# Altium PCB CC112xEM.PcbDoc
Units mil, origin at the board's own origin, x right, y up, seen from the top; angles counter-clockwise.
Board outline 1550.5 x 1401.5 mil, 4 copper layers (1, 2, 3, 4); 54 components, 34 nets, 148 pads, 31 vias.
Unrouted connection lines stored in the file: 53.
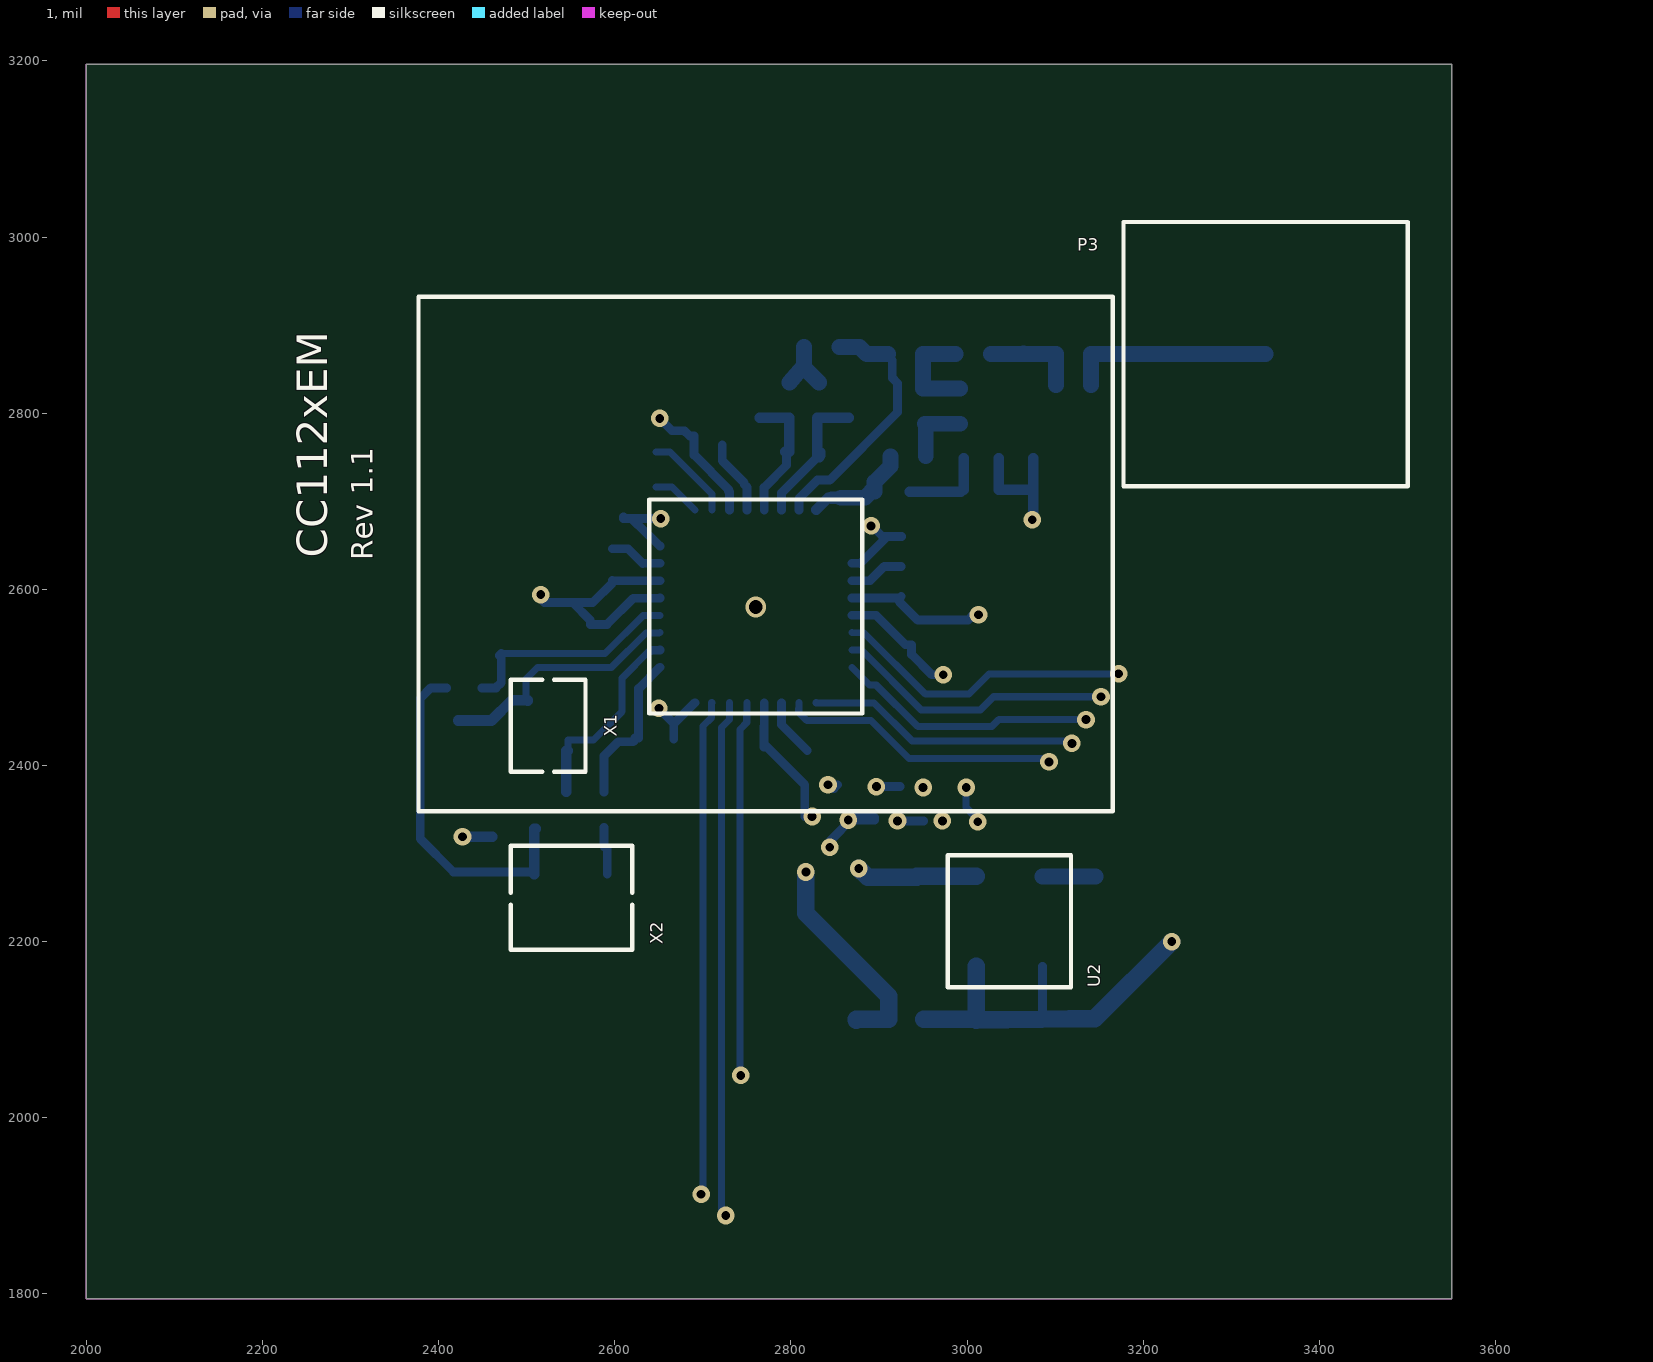
[diagram p0: 1 view]
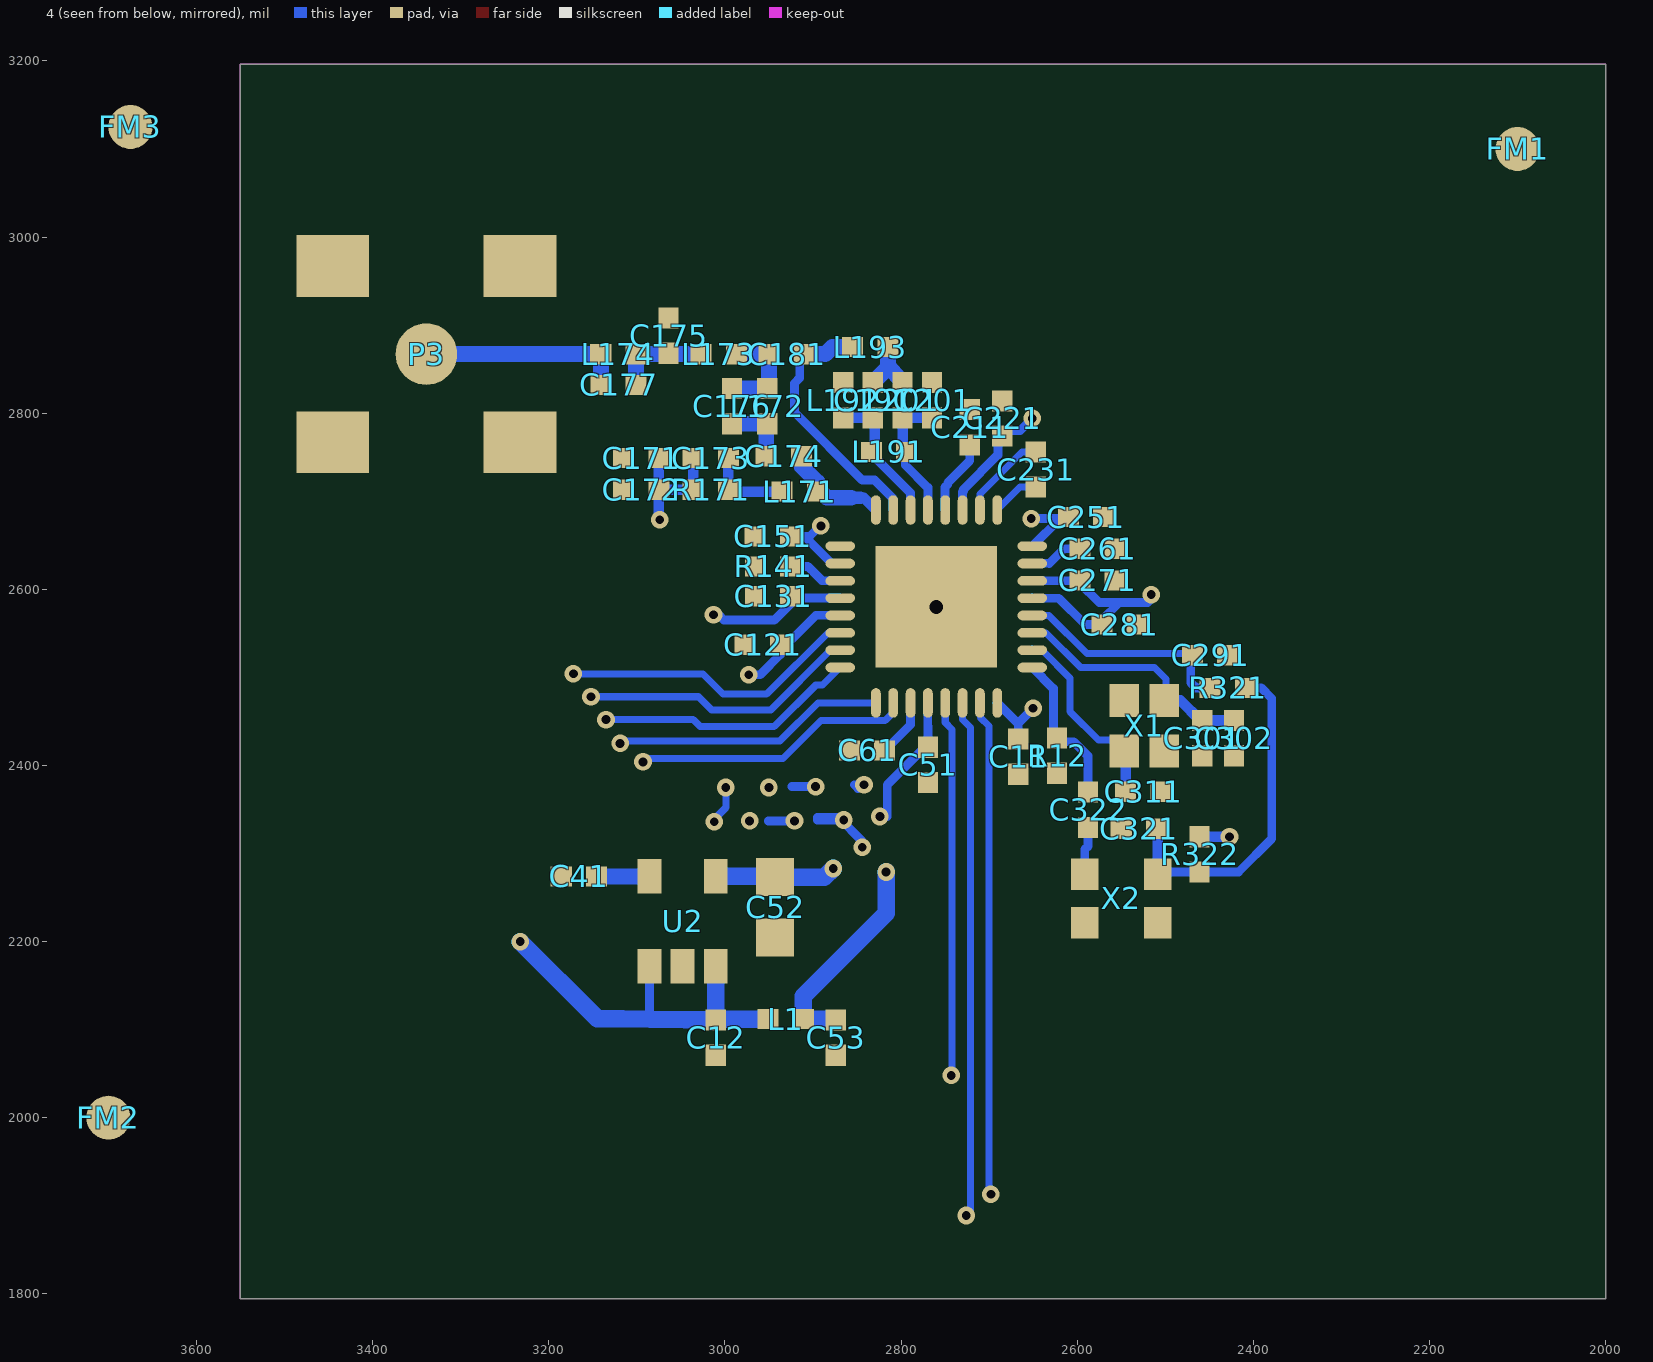
[diagram p1: 4 view, seen from below]
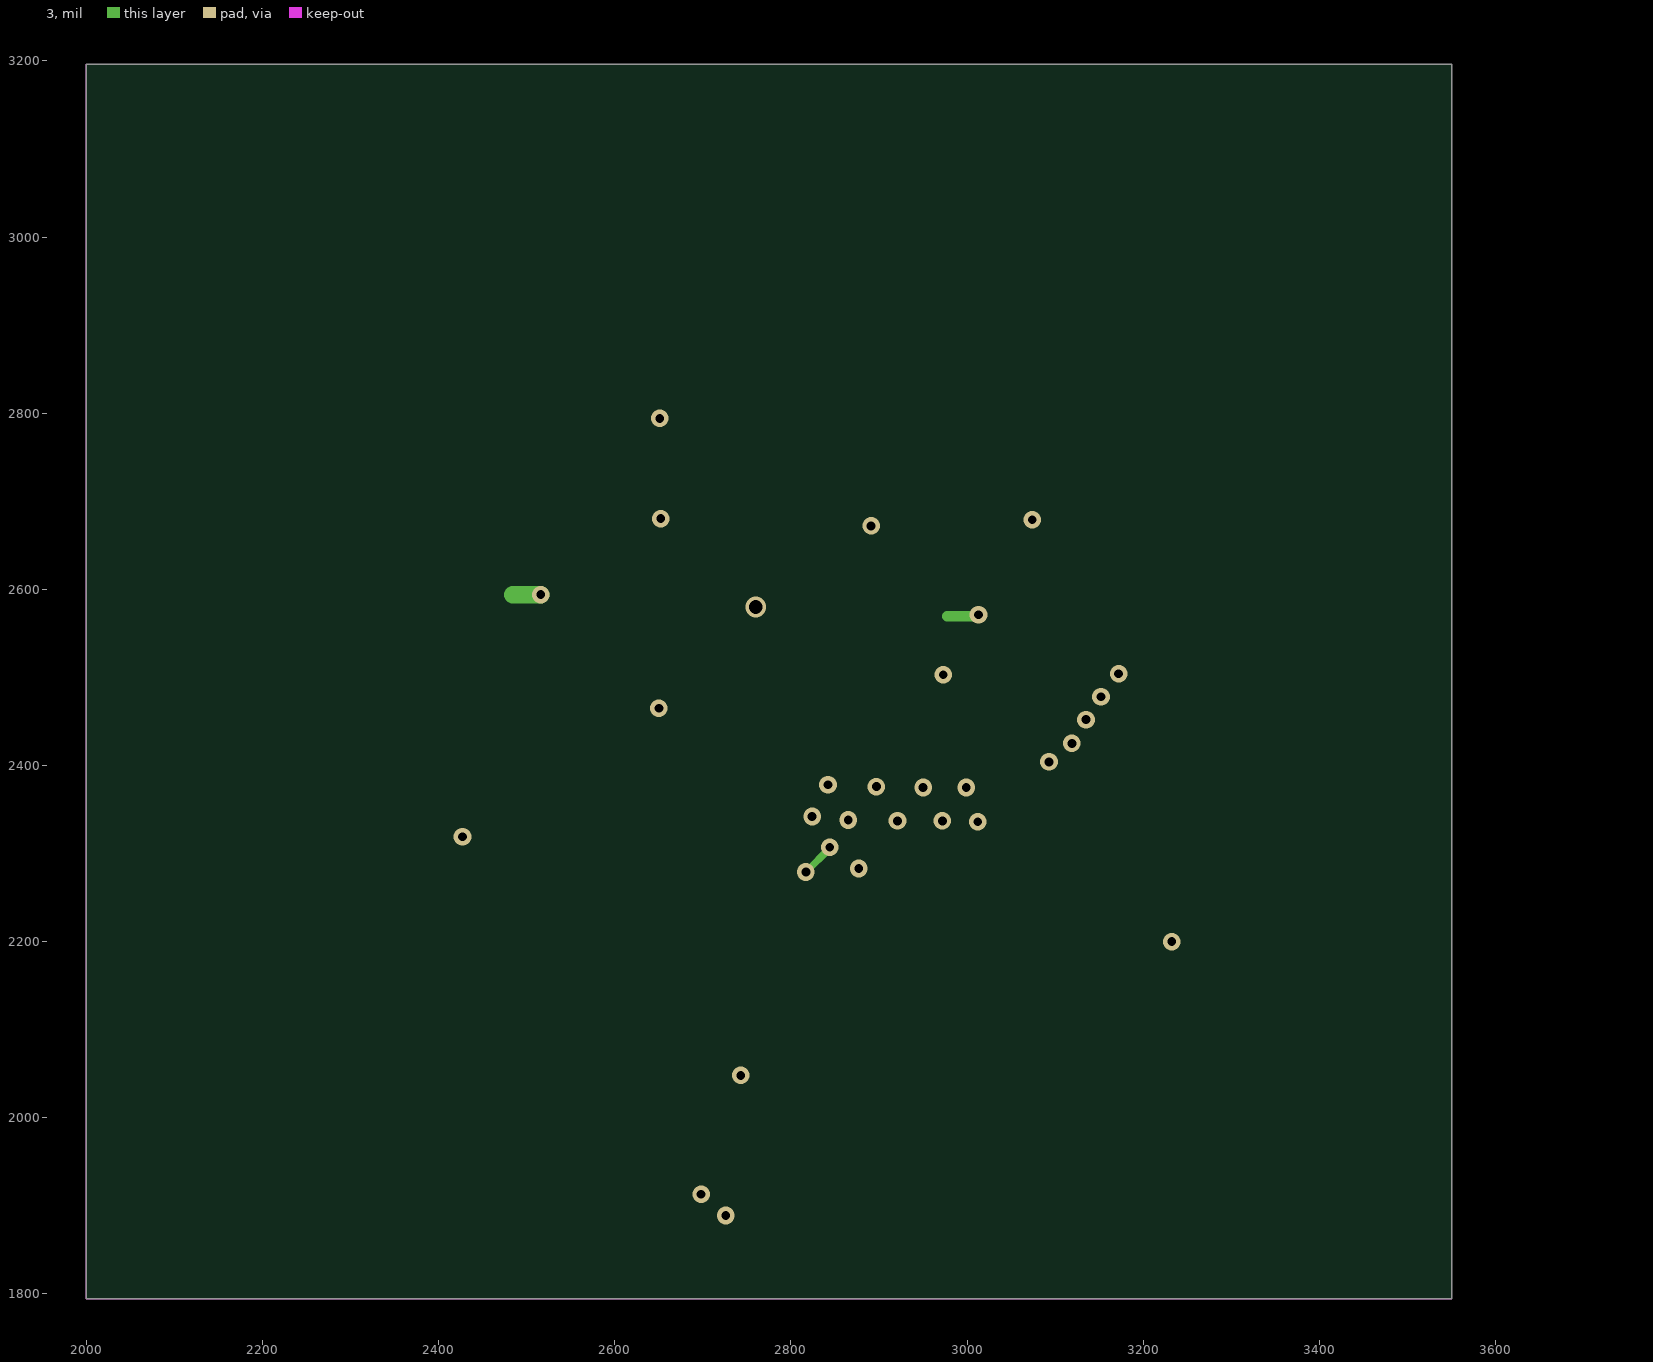
[diagram p2: 3]

## Layer stack, top to bottom
Top Solder Resist: solder mask 0.4, Solder Resist, Dk 3.5
1: signal copper (thickness not stored)
Dielectric 1: dielectric 12.6, FR-4, Dk 4.8
2: signal copper (thickness not stored)
Dielectric2: dielectric 12.6, FR-4, Dk 4.8
3: signal copper (thickness not stored)
Dielectric3: dielectric 12.6, FR-4, Dk 4.8
4: signal copper (thickness not stored)
Bottom Solder Resist: solder mask 0.4, Solder Resist, Dk 3.5

## Board outline
2000,1794.5 3550.5,1794.5 3550.5,3196 2000,3196

## Design rules (kind name [scope] priority, off if disabled: settings)
Clearance [All] p1: gap=1 ignorepadtopadclearanceinfootprint=FALSE except(0: Arc-SMDPad Track-SMDPad SMDPad-SMDPad SMDPad-THPad THPad-THPad)
ComponentClearance [All] p1: gap=0 collisioncheckmode=3 verticalgap=0 showdistances=FALSE
PolygonConnect [All] p1: connectstyle=Relief reliefconductorwidth=10 reliefentries=4 polygonreliefangle="90 Angle" airgapwidth=10
RoutingVias [All] p1: holewidth=28 width=50 viastyle="Through Hole" minholewidth=28 minwidth=50 maxholewidth=28 maxwidth=50
SolderMaskExpansion [All] p1: expansion=4
Width [All] p1: maxlimit=100 minlimit=1 preferedwidth=10
29 further rules are at their usual default settings.

## Components (designator, comment, footprint, x,y, rotation, side; value= is the part's Value field where it differs from the comment)
C11 "Comment" "0402 (REFLOW LF)" 2667,2410 r90 top
C12 "Comment" "0402 (REFLOW LF)" 3010.5,2091 r270 top
C41 "Comment" "0402 (REFLOW LF)" 3165.8,2274 r0 top
C51 "Comment" "0402 (REFLOW LF)" 2769.4,2400.6 r90 top
C52 "Comment" "0603 (REFLOW)" 2943,2239 r270 top
C53 "Comment" "0402 (REFLOW LF)" 2874,2091 r270 top
C61 "Comment" "0402 (REFLOW LF)" 2838.6,2417 r0 top
C121 "Comment" "0402 (REFLOW LF)" 2957,2537 r180 top
C131 "Comment" "0402 (REFLOW LF)" 2945.25,2592 r180 top
C151 "Comment" "0402 (REFLOW LF)" 2945.5,2660 r180 top
C171 "Comment" "0402 (REFLOW LF)" 3095,2749 r0 top
C172 "Comment" "0402 (REFLOW LF)" 3095,2713 r0 top
C173 "Comment" "0402 (REFLOW LF)" 3016,2749 r0 top
C174 "Comment" "0402 (REFLOW LF)" 2933,2751 r180 top
C175 "Comment" "0402 (REFLOW LF)" 3064,2888 r90 top
C176 "Comment" "0402 (REFLOW LF)" 2992,2808 r90 top
C177 "Comment" "0402 (REFLOW LF)" 3120.8,2832.1 r0 top
C181 "Comment" "0402 (REFLOW LF)" 2930,2867 r0 top
C191 "Comment" "0402 (REFLOW LF)" 2832,2814.75 r270 top
C201 "Comment" "0402 (REFLOW LF)" 2764.75,2814.75 r90 top
C211 "Comment" "0402 (REFLOW LF)" 2722,2784 r90 top
C221 "Comment" "0402 (REFLOW LF)" 2685,2794 r90 top
C231 "Comment" "0402 (REFLOW LF)" 2647,2736 r270 top
C251 "Comment" "0402 (REFLOW LF)" 2590,2682 r0 top
C261 "Comment" "0402 (REFLOW LF)" 2577,2646 r0 top
C271 "Comment" "0402 (REFLOW LF)" 2577,2610 r0 top
C281 "Comment" "0402 (REFLOW LF)" 2552,2560 r0 top
C291 "Comment" "0402 (REFLOW LF)" 2449,2525 r0 top
C301 "Comment" "0402 (REFLOW LF)" 2458,2431 r90 top
C302 "Comment" "0402 (REFLOW LF)" 2422,2431 r90 top
C311 "Comment" "0402 (REFLOW LF)" 2525,2370 r0 top
C321 "Comment" "0402 (REFLOW LF)" 2530,2328 r180 top
C322 "Comment" "0402 (REFLOW LF)" 2587.6,2349.7 r90 top
FM1 "Comment" FIDUCAL_MARK 2100,3100 r0 top
FM2 "Comment" FIDUCAL_MARK 3700,2000 r0 top
FM3 "Comment" FIDUCAL_MARK 3675,3125 r0 top
L1 "Comment" "0402 (REFLOW LF)" 2931,2112 r180 top
L171 "Comment" "0402 (REFLOW LF)" 2915,2711 r0 top
L172 "Comment" "0402 (REFLOW LF)" 2952,2808 r270 top
L173 "Comment" "0402 (REFLOW LF)" 3007,2867 r180 top
L174 "Comment" "0402 (REFLOW LF)" 3121,2867 r180 top
L191 "Comment" "0402 (REFLOW LF)" 2813.75,2756 r180 top
L192 "Comment" "0402 (REFLOW LF)" 2865.75,2814.75 r270 top
L193 "Comment" "0402 (REFLOW LF)" 2835,2875 r180 top
L201 "Comment" "0402 (REFLOW LF)" 2798.25,2814.75 r270 top
P3 "Comment" "SMA_SMD (Extended)" 3339,2867 r0 top
R12 "Comment" "0402 (REFLOW LF)" 2622.88,2411.19 r90 top
R141 "Comment" "0402 (REFLOW LF)" 2945.25,2626 r0 top
R171 "Comment" "0402 (REFLOW LF)" 3016,2713 r0 top
R321 "Comment" "0402 (REFLOW LF)" 2429,2488 r0 top
R322 "Comment" "0402 (REFLOW LF)" 2461,2299 r90 top
U2 "Comment" SOT23-5 3048,2223 r0 top
X1 "Comment" "XTAL_SMD_2x1_6 (2.0x1.6mm no paste reduction)" 2524,2445 r90 top
X2 "Comment" "TCXO_TG_5021CG (2.5x2mm)" 2550,2249 r0 top

## Footprints (in the part's own frame and the unit in brackets; to place one, negate y for a bottom-side part, rotate by r counter-clockwise, add the part's x,y. Pads: shape width x height; smd on the part's side, far side on the other; paste and mask are expansions set on the pad)
"0402 (REFLOW LF)" [mil]
  rect 24x23 smd far side paste+0 mask+6: 1(-20,0) 2(20,0)
"0603 (REFLOW)" [mil]
  rect 43.31x43.31 smd far side paste+0 mask+4: 1(-34.38,0) 2(34.37,0)
FIDUCAL_MARK [mil]
  round 50 smd far side paste+0 mask+4: 1(0,0)
"SMA_SMD (Extended)" [mm]
  round 1.778 smd far side paste+0 mask+0.076: 1(0,0)
  rect 2.1x1.78 smd far side paste+0 mask+0.07: 2(2.7,-2.54) 3(-2.7,-2.54) 4(-2.7,2.54) 5(2.7,2.54)
  silkscreen extent -4.1,-3.81 4.1,3.81
SOT23-5 [mil]
  rect 27x39 smd far side paste+0 mask+0: 1(-37.5,-51) 2(0,-51) 3(37.5,-51) 4(37.5,51) 5(-37.5,51)
  silkscreen extent -70,-75 70,75
"TCXO_TG_5021CG (2.5x2mm)" [mm]
  rect 0.8x0.9 smd far side paste-0.1 mask+0.1: 1(-1.05,-0.7) 2(1.05,-0.7) 3(1.05,0.7) 4(-1.05,0.7)
  silkscreen extent -1.73,-1.48 1.77,1.52
"XTAL_SMD_2x1_6 (2.0x1.6mm no paste reduction)" [mil]
  rect 37.5x33.5 smd far side paste+0 mask+3.9: 1(-28.54,-22.64) 2(28.54,-22.64) 3(28.54,22.64) 4(-28.54,22.64)
  silkscreen extent -52,-43 52,42

## Part data
C11 C51 C121 C131 C151 C221 C251 C261 C271 C281 C291: library part C_47N_0402_X7R_K_25, "Capacitor 0402"
C12 C321: library part C_100N_0402_X5R_K_10, "Capacitor 0402"
C41 C171 C211: library part C_10N_0402_X7R_K_25, "Capacitor 0402"
C52: library part C_2U2_0603_X5R_K_10, "Capacitor 0603"
C53 C177 C302: library part C_0402, "Capacitor 0402, general"
C61: library part C_220N_0402_X5R_K_10, "Capacitor 0402"
C172: library part C_100P_0402_NP0_J_50, "Capacitor 0402"
C173: library part C_56P_0402_NP0_J_50, "Capacitor 0402"
C174: library part C_39P_0402_NP0_J_50, "Capacitor 0402"
C175: library part C_6P2_0402_NP0_C_50, "Capacitor 0402"
C176: library part C_2P2_0402_NP0_C_50, "Capacitor 0402"
C181 C191 C201: library part C_5P1_0402_NP0_C_50, "Capacitor 0402"
C231: library part C_1N8_0402_U2J_J_10, "Capacitor 0402"
C301 C311: library part C_15P_0402_NP0_J_50, "Capacitor, 0402"
C322: library part C_22P_0402_NP0_J_50, "Capacitor 0402"
FM1 FM2 FM3: library part FIDUCIAL_MARK, "Fiducial mark"
L1: library part L_BEAD_102_0402, "EMI filter bead, BLM15HG102SN1D"
L171 L191: library part L_56N_0402_J_LQW, "Inductor, 56nH, 0402, Wire-wound type, +/-5%"
L172 L193: library part L_15N_0402_J_LQW, "Inductor, 15nH, 0402, Wire-wound type, +/- 5%"
L173: library part L_43N_0402_J_LQW, "Inductor, 43nH, 0402; Wire-wound type, +/- 5%"
L174: library part L_22N_0402_J_LQW, "Inductor, 22nH, 0402, Wire-wound type, +/- 5%"
L192 L201: library part L_27N_0402_J_LQW, "Inductor, 22nH, 0402, Wire-wound type, +/- 5%"
P3: library part SMA_SMD, "Surface-mount SMA, straight"
R12 R322: library part R_0_0402, "Resistor, 0402"
R141: library part R_56K_0402_F, "Resistor 0402"
R171: library part R_18_0402_J, "Resisitor 0402"
R321: library part R_0402, "Resistor 0402, general"
U2: library part TPS79930, "LDO 3V low noise"
X1: library part X_32.000/10/20/60/10, "Epson Toyocom FA128 32 MHz 2x1.6mm 10 pF, -40/85C, Q22FA1280009200"
X2: library part TG_5021CG, "EpsonToyocom miniature size TCXO 2.5x2.0mm"

## Free pads (board coordinates)
  oval 11.02x33.46 smd far side paste+0 mask+5.51: 1(2690.75,2470.98) 2(2710.43,2470.98) 3(2730.12,2470.98) 4(2749.8,2470.98) 5(2769.49,2470.98) 6(2789.17,2470.98) 7(2808.86,2470.98) 8(2828.54,2470.98) 17(2828.54,2689.98) 18(2808.86,2689.98) 19(2789.17,2689.98) 20(2769.49,2689.98) 21(2749.8,2689.98) 22(2730.12,2689.98) 23(2710.43,2689.98) 24(2690.75,2689.98)
  oval 33.46x11.02 smd far side paste+0 mask+5.51: 9(2868.98,2511.18) 10(2868.98,2530.87) 11(2868.98,2550.55) 12(2868.98,2570.24) 13(2868.98,2589.92) 14(2868.98,2609.61) 15(2868.98,2629.29) 16(2868.98,2648.98) 25(2650.98,2648.98) 26(2650.98,2629.29) 27(2650.98,2609.61) 28(2650.98,2589.92) 29(2650.98,2570.24) 30(2650.98,2550.55) 31(2650.98,2530.87) 32(2650.98,2511.18)
  rect 137.8x137.8 smd far side paste-137.8 mask+0: 33(2760,2580)

## Via types
v1: diameter 20, hole 10, 1 to 4, 30 vias
v2: diameter 23.62, hole 15.75, 1 to 4, 1 vias

## Nets (pads, with @x,y where several pads share a name; then routed paths per layer and width w, separated by ;. In a path a pad name is that pad's centre, name@x,y a point inside that pad or via, vN(x,y) a via of type N, cw(c..) or ccw(c..) an arc to the next point about the centre after c; other vN are vias at no path point)
3V3A: C12.1 L1.1 U2.1 U2.3 | length 440.1
  4 w10: 3084,2111.9 3085.5,2111.9 U2.3
  4 w20: L1.1 C12.1@3010.5,2112 ; U2.1 C12.1@3010.5,2112 ; v1(3232.3,2200) 3144.95,2112.65 3084,2111.9 C12.1 C12.1@3010.5,2112
87: C61.1 pad.6 | length 66.4
  4 w10: pad.6@2789.34,2471.19 2789.19,2446.41 C61.1
107: C211.1 pad.21 | length 85.5
  4 w10: C211.1 2722,2746.02 2747,2721.02 2747,2719 2750.18,2715.82 pad.21@2749.97,2690.19
110: C231.1 pad.23 | length 101.2
  4 w8: C231.1 2662.53,2756 2710.45,2708.08 2710.45,2698.31 pad.23@2710.6,2690.19
147: C291.2 pad.29 R321.2 | length 258.4
  4 w8: C291.2@2471,2527 2589,2527 2632.21,2570.21 2649,2570.21 pad.29@2651.15,2570.44
  4 w10: R321.2 2465,2488 2471,2494 2471,2527 C291.2
149: C261.2 pad.26 | length 61.1
  4 w10: C261.2 2615,2646 2631.69,2629.31 pad.26@2651.15,2629.5
192: C41.1 U2.4 | length 60.3
  4 w18: U2.4 C41.1
204: C311.2 pad.31 X1.1 | length 229.5
  4 w8: X1.1 2546.64,2429 2576,2429 2608,2461 2608,2499 2639.49,2530.49 pad.31@2641,2530.49
  4 w10: pad.31@2641,2530.49 pad.31@2651.15,2531.07
  4 w12: C311.2 2545,2416.46 X1.1
205: C301.2 C302.2 pad.30 X1.3 | length 287
  4 w8: X1.3@2499,2474 2499,2498 2512,2511 2596,2511 2635.54,2550.54 2650,2550.54 pad.30@2651.15,2550.76
  4 w12: C302.2 C301.2 2460,2451 2483,2474 2499,2474 2500.91,2474 X1.3
214: C321.2 R321.1 R322.1 X2.4 | length 392.2
  4 w10: R321.1 2391,2488 2379,2476 2379,2316.88 2416.88,2279 R322.1 X2.4@2508.66,2279
  4 w12: X2.4 2508.66,2279 2508.66,2328 C321.2
217: C191.2 L191.1 L192.2 pad.19 | length 166.1
  4 w10: pad.19@2789.34,2690.19 2789.19,2709.19 L191.1@2830,2750 ; L191.1@2832,2750 2834,2752 2834,2756 L191.1
  4 w12: L191.1@2832,2750 2830,2750 2830,2794.5 C191.2 L192.2
219: C201.1 L191.2 L201.2 pad.20 | length 152.9
  4 w10: pad.20@2769.66,2690.19 2769.5,2715.5 2795,2741 L191.2@2795,2756
  4 w12: C201.1 L201.2 2798,2756 2795,2756 L191.2
221: C191.1 L193.2 L201.1 | length 72
  4 w18: L201.1 2813.92,2852.58 ; L193.2 2815,2853.65 2813.92,2852.58 ; C191.1 2813.92,2852.58
222: C174.2 L171.1 pad.17 | length 122.4
  4 w12: pad.17@2828.71,2690.19 2842.56,2704 2846,2704
  4 w14: 2846,2704 2857,2704
  4 w18: 2857,2704 2884,2704 2891,2711 L171.1 2895,2721.77 2913,2739.77 C174.2
223: C181.1 L193.1 pad.18 | length 295.1
  4 w10: pad.18@2809,2690.19 2809,2702.87 2830.06,2723.94 2843.94,2723.94 2921,2801 2921,2834 2915,2840 2915,2860 C181.1@2908,2867
  4 w18: L193.1 2878,2875 2886,2867 2908,2867 C181.1
224: C176.2 C181.2 L172.1 L173.2 | length 118
  4 w18: L173.2 C181.2 2950,2828 L172.1 C176.2
228: C231.2 pad.24 | length 54.6
  4 w8: C231.2 2665.1,2716 pad.24@2690.91,2690.19
243: pad.14 R141.1 | length 62.9
  4 w10: pad.14@2869.15,2609.81 2889.62,2609.62 2906,2626 R141.1
258: C322.1 X2.3 | length 54.7
  4 w10: C322.1 2587.6,2308.4 2591.34,2304.66 X2.3
259: C322.2 pad.32 R12.2 | length 181.1
  4 w10: C322.2 2587.6,2410.6 2604,2427 2620.81,2427 R12.2@2625,2431.19 ; R12.2 R12.2@2625,2431.19 ; pad.32@2651.15,2511.39 2627,2487.2 2627,2431.19 R12.2@2625,2431.19
278: C173.1 L171.2 R171.1 | length 98.2
  4 w12: L171.2 2993,2711 R171.1@2996,2714 ; R171.1 R171.1@2996,2714 ; C173.1 R171.1@2996,2714
279: C174.1 C176.1 L172.2 | length 77
  4 w18: L172.2 L172.2@2953,2788 ; C174.1 L172.2@2953,2788 ; C176.1 L172.2@2953,2788
280: C177.2 L174.1 P3.1 | length 237.1
  4 w18: C177.2 3140.8,2867 L174.1@3145,2867 ; L174.1 L174.1@3145,2867 ; P3.1 L174.1@3145,2867
282: C175.1 C177.1 L173.1 L174.2 | length 109.9
  4 w18: L173.1 C175.1@3064,2867 ; C175.1 C175.1@3064,2867 ; C177.1 L174.2@3100.8,2867 ; L174.2 L174.2@3100.8,2867 ; C175.1@3064,2867 L174.2@3100.8,2867
AGND: C11.1 C12.2 C41.2 C51.1 C52.2 C53.2 C61.2 C121.1 C131.1 C151.1 C171.2 C172.2 C175.2 C201.2 C211.2 C221.2 C251.1 C261.1 C271.1 C281.1 C291.1 C301.1 C302.1 C311.1 C321.1 L192.1 P3.2 P3.3 P3.4 P3.5 pad.33 R12.1 R141.2 U2.2 X1.2 X1.4 X2.2
  other v2: 2760,2580
CSN: pad.11 | length 341.2
  4 w8: pad.11@2869.15,2550.76 2882.96,2550.57 2952.53,2481 3002,2481 3025,2504 v1(3172,2504)
GPIO0: pad.10 | length 317.2
  4 w8: pad.10@2869.15,2531.07 2880.02,2530.88 2947.9,2463 3015,2463 3030,2478 v1(3152,2478)
GPIO2: pad.4 | length 434.3
  4 w8: v1(2743,2048) 2740,2048 2742,2046 2742,2441 2749.82,2448.82 pad.4@2749.97,2471.19
GPIO3: pad.3 | length 591
  4 w8: v1(2726,1889) 2721,1889 2721,2443 2730.13,2452.13 pad.3@2730.28,2471.19
MISO: pad.9 | length 297.2
  4 w8: pad.9@2869.15,2511.39 2889.1,2491.1 2896.9,2491.1 2944,2444 3028,2444 3036,2452 v1(3135,2452)
MOSI: pad.7 | length 320.8
  4 w8: pad.7@2809.03,2471.19 2808.87,2460.13 2818,2451 2891,2451 2934,2408 3093,2408 v1(3093,2404)
RESET: pad.2 | length 563.8
  4 w8: v1(2698,1913) 2698,1919 2700,1921 2700,2444.63 2710,2454.63 2710,2471.19 pad.2@2710.6,2471.19
SCLK: pad.8 | length 309.3
  4 w8: pad.8@2828.71,2471.19 2894.37,2471 2937.37,2428 3114,2428 3117,2425 v1(3119,2425)
VDD_REG: C11.2 C51.2 C52.1 C53.1 C121.2 C131.2 C151.2 C171.1 C172.1 C173.2 C221.1 C251.2 C271.2 C281.2 L1.2 pad.1 pad.5 pad.12 pad.13 pad.15 pad.22 pad.25 pad.27 pad.28 R171.2 R322.2 U2.5 | length 2076.3
  3 w8: v1(2817,2279) 2844,2306 v1(2844,2307)
  3 w12: 2977.69,2569.38 3011.38,2569.38 v1(3013,2571)
  3 w20: 2484,2594 v1(2516,2594)
  4 w8: v1(2999,2375) 2999,2352 3015,2336 v1(3012,2336)
  4 w10: v1(2516,2594) 2511,2594 2520,2585 2552,2585 ; C251.2 2610,2680.25 C251.2@2615,2680.25 ; v1(2650,2465) 2667,2448 2667,2447.24 ; v1(2651,2794) 2651,2793.88 2664.88,2780 2679,2780 C221.1 2690,2774 2690,2752.57 2729,2713.57 2729,2711.54 2730.13,2710.41 2730.13,2708.87 pad.22@2730.28,2690.19 ; pad.28@2651.15,2590.13 2620.94,2589.94 2591,2560 C281.2 2572,2565 2552,2585 ; pad.27@2651.15,2609.81 2597.38,2609.62 C271.2 2597,2607 2575,2585 2573.88,2585 2552,2585 ; pad.25@2651.15,2649.18 2619.35,2680.25 C251.2@2615,2680.25 ; v1(2652.25,2680.25) C251.2@2615,2680.25 ; C11.2 2667,2447.24 ; pad.1@2690.91,2471.19 2667,2447.24 ; C51.2 2769.5,2420.7 C51.2@2769.5,2421 ; pad.5@2769.66,2471.19 C51.2@2769.5,2421 ; v1(2824,2342) 2815.65,2342 2815.65,2378.06 2769.5,2424.21 C51.2@2769.5,2421 ; v1(2842,2378) 2852.89,2378 v1@2848.84,2373.95 ; v1(2844,2307) 2844,2314 2871,2341 2895,2341 2895,2338 v1(2865,2338) ; pad.12@2869.15,2570.44 2896.75,2570.25 2930,2537 C121.2 2937,2526 2960,2503 v1(2973,2503) ; pad.13@2869.15,2590.13 C131.2@2923,2590 ; pad.15@2869.15,2629.5 2878.72,2629.31 2909.42,2660 C151.2@2920,2660 ; v1(2891,2672) 2891,2673 2904,2660 2913,2660 ; v1(2897,2376) 2924,2376 ; v1(2921,2337) 2950.53,2337 ; C131.2 C131.2@2923,2590 ; v1(2950,2375) v1@2950.06,2375.06 ; v1(3013,2571) 3007,2571 3001,2565 2944,2565 2923,2586 C131.2@2923,2590 ; 2913,2660 C151.2@2920,2660 ; 2913,2660 C151.2 C151.2@2920,2660
  4 w12: v1(2427,2319) R322.2 ; C173.2 R171.2 C172.1 ; v1(3074,2679) 3075,2680 C172.1 ; C171.1 C172.1
  4 w20: v1(2817,2279) 2817,2232 2911,2138 L1.2 2874,2112 C53.1 ; v1(2877,2283) 2887,2273 2943,2273 C52.1 2943,2274 U2.5
  other v1: 2972,2337
pads on no net: FM1.1 FM2.1 FM3.1 X2.1

## Keep-outs
Keep-Out Layer:
  the board outline again, w1

## Silkscreen, mask and mechanical layers (free items; w line width, h text height)
Top Silk:
  lines w5: 2377.1,2348.2 2377.1,2932.1 3165.5,2932.1 3165.5,2348.2 2377.1,2348.2 ; 2638.98,2458.98 2880.98,2458.98 2880.98,2701.98 2638.98,2701.98 2638.98,2458.98
  text "CC112xEM" at 2273.2,2635.7 h35 r90
  text "Rev 1.1" at 2325.3,2633.2 h24.5 r90
Top Assembly:
  lines w1: 2657.98,2477.98 2863.98,2477.98 2863.98,2683.98 2657.98,2683.98 2657.98,2477.98
Top Placement:
  lines w0.1: 2657.98,2477.98 2863.98,2477.98 2863.98,2684.98 2657.98,2684.98 2657.98,2477.98

## Dimensions
1999,2018 to 3549,2018 on Unassigned
1982,3193 to 1982,1793 on Unassigned